# Altium PCB PCB1.PcbDoc (part 2 of 2)
Units mil, origin at the board's own origin, x right, y up, seen from the top; angles counter-clockwise.
Board outline 2755.91 x 2362.2 mil, 4 copper layers (Top Layer, GND, POWER, Bottom Layer), stack 23.756 mil thick; 125 components, 157 nets, 714 pads, 307 vias.
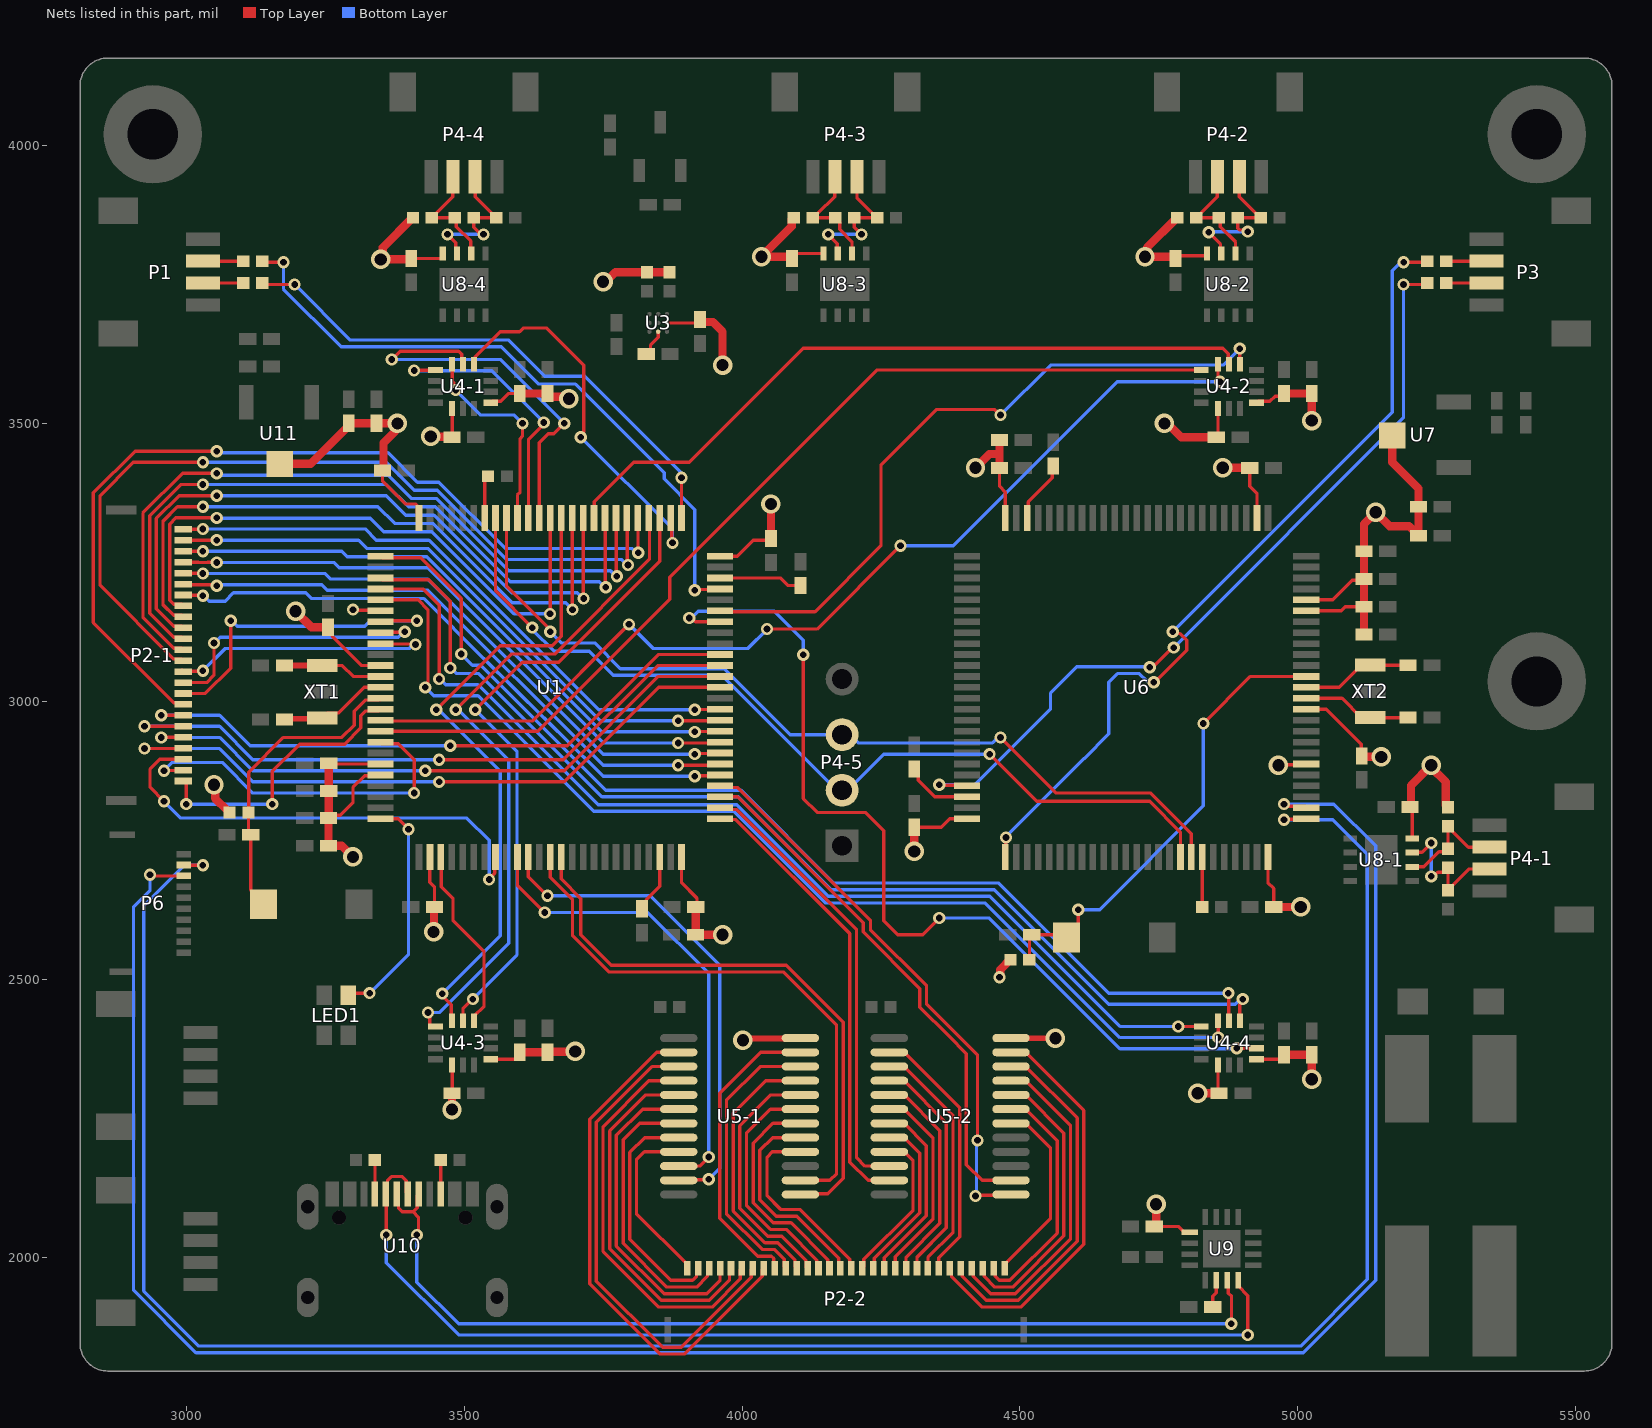
[diagram p4: the nets of this part, all layers, seen from the top]

## Via types
v1: diameter 22, hole 12, Top Layer to Bottom Layer, 205 vias
v2: diameter 35, hole 22, Top Layer to Bottom Layer, 102 vias

## Nets (pads, with @x,y where several pads share a name; then routed paths per layer and width w, separated by ;. In a path a pad name is that pad's centre, name@x,y a point inside that pad or via, vN(x,y) a via of type N, cw(c..) or ccw(c..) an arc to the next point about the centre after c; other vN are vias at no path point) (continued)
ICM4_INT2: U1.69 U4-4.9 | length 1697
  Top Layer w6: v1(3905,3150) 3909.33,3150 3916.22,3143.11 U1.69@3960.12,3143.11 ; v1(4110,3083.74) 4110,2825 4135,2800 4221.97,2800 4255,2766.97 4255,2605 4280,2580 4325,2580 v1(4355,2610) ; v1(4889.99,2375.98) 4890.12,2375.84 4925.58,2375.84 U4-4.9@4925.71,2375.71
  Bottom Layer w6: v1(3905,3150) 3909.28,3150 3921.28,3162 4058.25,3162 4110,3110.25 v1(4110,3083.74) ; v1(4355,2610) 4445,2610 4680,2375 4889.01,2375 v1(4889.99,2375.98)
MT_Lepton_EN: P6.2 U6.1 | length 4137.9
  Top Layer w6: P6.2@2995.63,2705.47 2995.86,2705.24 3029.76,2705.24 v1(3030,2705) ; v1(4975,2787) 4975.89,2787.89 5014.23,2787.89 U6.1@5015.12,2788.78
  Bottom Layer w6: v1(3030,2705) 2996.72,2705 2923.5,2631.78 2923.5,1939.02 3022.52,1840 5005,1840 5125,1960 5125,2725 5063,2787 v1(4975,2787)
MT_VSYNC: P6.3 U6.2 | length 4177.7
  Top Layer w6: v1(2935,2688.1) 2937.31,2685.79 P6.3@2995.63,2685.79 ; v1(4975,2815) 4979.33,2815 4982.86,2811.46 5012.12,2811.46 U6.2@5015.12,2808.46
  Bottom Layer w6: v1(2935,2688.1) 2935,2660.25 2905.26,2630.52 2905.26,1940.29 3017.55,1828 5009.97,1828 5140,1958.03 5140,2740 5065,2815 v1(4975,2815)
NetC4_2: C4.2 U1.48 | length 106.3
  Top Layer w6: C4.2@3820,2626.78 3827.63,2634.41 3827.63,2642.63 3851.85,2666.85 U1.48@3851.85,2719.88
NetC5_2: C5.2 U1.73 | length 150.5
  Top Layer w6: U1.73@3960.12,3221.85 4069.12,3221.85 4082.75,3208.22 C5.2@4105,3208.22
NetC20_2: C20.2 U3.C2 | length 48.7
  Top Layer w6: C20.2@3829.25,3626.78 3829.51,3626.78 3835.37,3632.63 3835.37,3641.12 3849.25,3655 U3.C2@3849.25,3664.49
  Top Layer w10: C20.2@3827.47,3625 C20.2@3829.25,3626.78
NetC36_2: C36.2 U6.48 | length 112.5
  Top Layer w6: U6.48@4513.15,3330.12 4514.8,3331.77 4514.8,3358.7 4558.29,3402.19 4558.29,3421.51 C36.2@4560,3423.22
NetC37_2: C37.2 U6.73 | length 123.4
  Top Layer w6: C37.2@4310,2878.22 4316.84,2871.38 4316.84,2858.16 4346.85,2828.15 U6.73@4404.88,2828.15
NetC56_2: C56.2 U9.6 | length 50.7
  Top Layer w6: C56.2@4846.77,1910 4846.77,1929.78 4853.07,1936.08 U9.6@4853.07,1958.07
NetP1_2: P1.2 R3.2 | length 72.5
  Top Layer w6: P1.2@3030.49,3791.83 R3.2@3102.96,3791.83
NetP1_3: P1.3 R4.2 | length 72.5
  Top Layer w6: P1.3@3030.49,3752.46 R4.2@3102.96,3752.46
NetP3_2: P3.2 R11.2 | length 72.5
  Top Layer w6: R11.2@5267.04,3752.46 P3.2@5339.51,3752.46
NetP3_3: P3.3 R12.2 | length 72.5
  Top Layer w6: R12.2@5267.04,3791.83 P3.3@5339.51,3791.83
NetR1_2: R1.2 U1.94 | length 75.3
  Top Layer w6: U1.94@3536.89,3330.12 3536.89,3403.93 R1.2@3537.96,3405
NetR9_2: R9.2 U6.94 | length 89.9
  Top Layer w6: R9.2@4827.96,2630 4828.11,2630.15 U6.94@4828.11,2719.88
NetR25_2: R25.2 U10.A5 | length 61.6
  Top Layer w6: U10.A5@3339.55,2113.36 R25.2@3339.55,2175
NetR26_2: R26.2 U10.B5 | length 61.6
  Top Layer w6: U10.B5@3457.66,2113.36 R26.2@3457.66,2175
PALM_COM_USART1_RX: P4-5.2 U1.93 U6.92 | length 1652.3
  Top Layer w6: U1.93@3556.57,3330.12 3556.57,3198.64 v1(3622.61,3132.61) ; v1(4445.38,2905) 4530.38,2820 4733.28,2820 4788.74,2764.54 U6.92@4788.74,2719.88
  Bottom Layer w6: v1(3622.61,3132.61) 3622.61,3129.11 3661.72,3090 3725,3090 3768.31,3046.69 3963.31,3046.69 4180,2830 4255,2905 v1(4445.38,2905)
PALM_COM_USART1_TX: P4-5.3 U1.92 U6.93 | length 1591.8
  Top Layer w6: U1.92@3576.26,3330.12 3576.26,3207.24 3655,3128.5 v1(3655,3125) ; v1(4465,2935) 4565,2835 4735.25,2835 4808.43,2761.83 U6.93@4808.43,2719.88
  Bottom Layer w6: v1(3655,3125) 3675,3105 3735,3105 3781.31,3058.69 3968.28,3058.69 4086.97,2940 4194.36,2940 4209.36,2925 4450.67,2925 4460.67,2935 v1(4465,2935)
PX1: P2-2.1 U5-1.9 | length 314.9
  Top Layer w6: U5-1.9@3886.1,2189.41 3824.41,2189.41 3810,2175 3810,2078.29 3901.4,1986.89 P2-2.1@3901.4,1980
PX2: P2-2.2 U5-1.8 | length 425
  Top Layer w6: U5-1.8@3886.1,2215 3824.7,2215 3798,2188.3 3798,2032 3871.8,1958.2 3911.03,1958.2 3918.18,1965.36 3918.18,1977.09 P2-2.2@3921.09,1980
PX3: P2-2.3 U5-1.7 | length 506.7
  Top Layer w6: U5-1.7@3886.1,2240.59 3815.59,2240.59 3786,2211 3786,2024.91 3864.71,1946.2 3918.72,1946.2 3937.86,1965.35 3937.86,1977.09 P2-2.3@3940.77,1980
PX4: P2-2.4 U5-1.6 | length 584.4
  Top Layer w6: U5-1.6@3886.1,2266.19 3821.19,2266.19 3774,2219 3774,2019.94 3859.74,1934.2 3936.46,1934.2 3960.46,1958.2 P2-2.4@3960.46,1980
PX5: P2-2.5 U5-1.5 | length 654.6
  Top Layer w6: U5-1.5@3886.1,2291.78 3826.78,2291.78 3762,2227 3762,2014.97 3854.77,1922.2 3941.43,1922.2 3977.43,1958.2 3977.43,1977.29 P2-2.5@3980.14,1980
PX6: P2-2.6 U5-1.4 | length 724.9
  Top Layer w6: U5-1.4@3886.1,2317.37 3832.37,2317.37 3750,2235 3750,2010 3849.8,1910.2 3946.4,1910.2 3996.92,1960.73 3996.92,1977.09 P2-2.6@3999.83,1980
PX7: P2-2.7 U5-1.3 | length 873.5
  Top Layer w6: U5-1.3@3886.1,2342.96 3837.96,2342.96 3738,2243 3738,1956.66 3856.92,1837.73 3890.9,1837.73 4016.6,1963.44 4016.6,1977.09 P2-2.7@4019.51,1980
PX8: P2-2.8 U5-1.2 | length 942.5
  Top Layer w6: U5-1.2@3886.1,2368.55 3846.58,2368.55 3726,2247.97 3726,1951.69 3851.95,1825.73 3896.67,1825.73 4036.29,1965.36 4036.29,1977.09 P2-2.8@4039.2,1980
PX9: P2-2.9 U5-1.23 | length 545.9
  Top Layer w6: P2-2.9@4058.88,1980 4057.06,1981.82 4057.06,1997.61 4052.87,2001.8 4028.2,2001.8 3960,2070 3960,2295 4033.55,2368.55 U5-1.23@4105,2368.55
PX10: P2-2.10 U5-1.22 | length 517.1
  Top Layer w6: P2-2.10@4078.57,1980 4075.66,1982.91 4075.66,1995.97 4057.84,2013.8 4036.2,2013.8 3972,2078 3972,2282 4032.96,2342.96 U5-1.22@4105,2342.96
PX11: P2-2.11 U5-1.21 | length 485
  Top Layer w6: P2-2.11@4098.25,1980 4095.34,1982.91 4095.34,1994.65 4064.2,2025.8 4041.18,2025.8 3984,2082.97 3984,2259 4042.37,2317.37 U5-1.21@4105,2317.37
PX12: P2-2.12 U5-1.20 | length 453.7
  Top Layer w6: U5-1.20@4105,2291.78 4051.78,2291.78 3996,2236 3996,2087.94 4046.15,2037.8 4071.88,2037.8 4115.03,1994.64 4115.03,1982.91 P2-2.12@4117.94,1980
PX13: P2-2.13 U5-1.19 | length 428.2
  Top Layer w6: U5-1.19@4105,2266.19 4051.19,2266.19 4008,2223 4008,2092.91 4051.12,2049.8 4079.57,2049.8 4134.71,1994.65 4134.71,1982.91 P2-2.13@4137.62,1980
PX14: P2-2.14 U5-1.18 | length 400.4
  Top Layer w6: U5-1.18@4105,2240.59 4055.59,2240.59 4020,2205 4020,2097.88 4056.09,2061.8 4088.2,2061.8 4154.4,1995.6 4154.4,1982.91 P2-2.14@4157.31,1980
PX15: P2-2.15 U5-1.17 | length 376.5
  Top Layer w6: U5-1.17@4105,2215 4055,2215 4032,2192 4032,2103 4061.2,2073.8 4098.57,2073.8 4174.08,1998.28 4174.08,1982.91 P2-2.15@4176.99,1980
PX16: P2-2.16 U5-1.16 | length 347.2
  Top Layer w6: U5-1.16@4105,2189.41 4054.41,2189.41 4045,2180 4045,2110 4069.2,2085.8 4104.2,2085.8 4193.77,1996.23 4193.77,1982.91 P2-2.16@4196.68,1980
PX17: P2-2.17 U5-2.9 | length 280.4
  Top Layer w6: P2-2.17@4216.36,1980 4219.26,1982.91 4219.26,1996.23 4307.66,2084.63 4307.66,2173.24 4291.5,2189.41 U5-2.9@4265,2189.41
PX18: P2-2.18 U5-2.8 | length 307.8
  Top Layer w6: P2-2.18@4236.05,1980 4237.74,1981.69 4237.74,1997.74 4319.66,2079.66 4319.66,2186.83 4291.5,2215 U5-2.8@4265,2215
PX19: P2-2.19 U5-2.7 | length 335.2
  Top Layer w6: P2-2.19@4255.73,1980 4255.73,1998.76 4331.66,2074.69 4331.66,2200.42 4291.5,2240.59 U5-2.7@4265,2240.59
PX20: P2-2.20 U5-2.6 | length 362.6
  Top Layer w6: U5-2.6@4265,2266.19 4291.5,2266.19 4343.66,2214.02 4343.66,2068.66 4275.42,2000.42 P2-2.20@4275.42,1980
PX21: P2-2.21 U5-2.5 | length 389.9
  Top Layer w6: U5-2.5@4265,2291.78 4291.5,2291.78 4355.66,2227.61 4355.66,2060.66 4295.1,2000.1 P2-2.21@4295.1,1980
PX22: P2-2.22 U5-2.4 | length 417.3
  Top Layer w6: U5-2.4@4265,2317.37 4291.5,2317.37 4367.66,2241.2 4367.66,2052.66 4314.79,1999.79 P2-2.22@4314.79,1980
PX23: P2-2.23 U5-2.3 | length 444.7
  Top Layer w6: U5-2.3@4265,2342.96 4291.5,2342.96 4379.66,2254.79 4379.66,2044.66 4334.47,1999.47 P2-2.23@4334.47,1980
PX24: P2-2.24 U5-2.2 | length 472.1
  Top Layer w6: U5-2.2@4265,2368.55 4291.5,2368.55 4391.66,2268.38 4391.66,2036.66 4354.16,1999.16 P2-2.24@4354.16,1980
PX25: P2-2.25 U5-2.23 | length 738.8
  Top Layer w6: P2-2.25@4373.84,1980 4376.74,1977.09 4376.74,1965.36 4431.89,1910.2 4501.78,1910.2 4615,2023.42 4615,2263.95 4510.4,2368.55 U5-2.23@4483.9,2368.55
PX26: P2-2.26 U5-2.22 | length 663.7
  Top Layer w6: P2-2.26@4393.53,1980 4396.43,1977.09 4396.43,1965.35 4439.57,1922.2 4496.81,1922.2 4603,2028.39 4603,2250.36 4510.4,2342.96 U5-2.22@4483.9,2342.96
PX27: P2-2.27 U5-2.21 | length 588.6
  Top Layer w6: P2-2.27@4413.21,1980 4416.11,1977.09 4416.11,1965.36 4447.26,1934.2 4491.84,1934.2 4591,2033.36 4591,2236.77 4510.4,2317.37 U5-2.21@4483.9,2317.37
PX28: P2-2.28 U5-2.20 | length 513.5
  Top Layer w6: P2-2.28@4432.9,1980 4435.8,1977.09 4435.8,1965.35 4454.94,1946.2 4486.87,1946.2 4579,2038.33 4579,2223.18 4510.4,2291.78 U5-2.20@4483.9,2291.78
PX29: P2-2.29 U5-2.19 | length 438.4
  Top Layer w6: P2-2.29@4452.58,1980 4455.48,1977.09 4455.48,1965.36 4462.63,1958.2 4481.9,1958.2 4567,2043.3 4567,2209.59 4510.4,2266.19 U5-2.19@4483.9,2266.19
PX30: P2-2.30 U5-2.18 | length 339.8
  Top Layer w6: P2-2.30@4472.27,1980 4472.27,1986.89 4555,2069.62 4555,2195.99 4510.4,2240.59 U5-2.18@4483.9,2240.59
PY1: P2-1.1 U1.15 | length 512.9
  Top Layer w6: P2-1.1@2995,2856.58 2997.09,2856.58 3000,2853.67 v1(3000,2815) ; v1(3155,2815) 3155,2874.01 3203.99,2923 3284.97,2923 3314.17,2952.2 3314.17,2974.17 3322.64,2982.64 3346.89,2982.64 U1.15@3349.88,2985.63
  Bottom Layer w6: v1(3000,2815) v1(3155,2815)
PY2: P2-1.2 U1.18 | length 647.7
  Top Layer w6: v1(2960,2875) 2960.63,2875.63 2994.37,2875.63 P2-1.2@2995,2876.26 ; U1.18@3349.88,2926.57 3352.88,2923.57 3381.43,2923.57 3410,2895 v1(3410,2835)
  Bottom Layer w6: v1(2960,2875) 2975,2890 3065,2890 3120,2835 v1(3410,2835)
PY3: P2-1.3 U1.33 | length 865.6
  Top Layer w6: v1(2960,2820) 2935,2845 2935,2878.28 2952.67,2895.95 P2-1.3@2995,2895.95 ; v1(3545,2679.51) 3545,2680.86 3555.18,2691.05 3555.18,2718.49 U1.33@3556.57,2719.88
  Bottom Layer w6: v1(2960,2820) 2990,2790 3505,2790 3545,2750 v1(3545,2679.51)
PY4: P2-1.4 U1.63 | length 1200.6
  Top Layer w6: v1(2925,2915) 2994.37,2915 P2-1.4@2995,2915.63 ; v1(3455,2855) 3679.81,2855 3849.81,3025 U1.63@3960.12,3025
  Bottom Layer w6: v1(2925,2915) 3060,2915 3120,2855 v1(3455,2855)
PY5: P2-1.5 U1.64 | length 1140.4
  Top Layer w6: v1(2955,2935) 2955.16,2935.16 2994.84,2935.16 P2-1.5@2995,2935.32 ; v1(3430,2875) 3679.97,2875 3849.65,3044.68 U1.64@3960.12,3044.68
  Bottom Layer w6: v1(2955,2935) 3060,2935 3120,2875 v1(3430,2875)
PY6: P2-1.6 U1.65 | length 1200.1
  Top Layer w6: v1(2925,2955) P2-1.6@2995,2955 ; v1(3455,2895) 3678.74,2895 3848.11,3064.37 U1.65@3960.12,3064.37
  Bottom Layer w6: v1(2925,2955) 3060,2955 3120,2895 v1(3455,2895)
PY7: P2-1.7 U1.66 | length 1136
  Top Layer w6: v1(2955,2975) 2955.16,2974.84 2994.84,2974.84 P2-1.7@2995,2974.68 ; v1(3475,2920) 3685.41,2920 3849.46,3084.06 U1.66@3960.12,3084.06
  Bottom Layer w6: v1(2955,2975) 3060,2975 3115,2920 v1(3475,2920)
PY8: P2-1.8 U1.80 | length 1606.9
  Top Layer w6: P2-1.8@2995,2994.37 2992.09,2997.28 2977.39,2997.28 2833,3141.67 2833,3374.97 2908.03,3450 v1(3055,3450) ; U1.80@3812.48,3330.12 3812.95,3329.65 3812.95,3267.61 v1(3813.43,3267.14)
  Bottom Layer w6: v1(3055,3450) 3058.06,3446.94 3363.06,3446.94 3416,3394 3454.79,3394 3573.79,3275 3801.91,3275 3809.77,3267.14 v1(3813.43,3267.14)
PY9: P2-1.9 U1.7 | length 598.4
  Top Layer w6: P2-1.9@2995,3014.05 3034.3,3014.05 3080,3059.75 v1(3080,3145) ; U1.7@3349.88,3143.11 3351.77,3145 v1(3415,3145)
  Bottom Layer w6: v1(3080,3145) 3081.51,3145 3091.51,3135 3321.25,3135 3331.25,3145 v1(3415,3145)
PY10: P2-1.10 U1.8 | length 514.1
  Top Layer w6: P2-1.10@2995,3033.74 3037.02,3033.74 3050,3046.72 v1(3050,3105) ; U1.8@3349.88,3123.43 3350.67,3124.21 3392.41,3124.21 v1(3393.2,3125)
  Bottom Layer w6: v1(3050,3105) 3051.51,3105 3061.51,3115 3381.69,3115 3391.69,3125 v1(3393.2,3125)
PY11: P2-1.11 U1.9 | length 505.4
  Top Layer w6: P2-1.11@2992.09,3056.33 P2-1.11@2995,3053.42 2995.79,3054.21 3029.21,3054.21 v1(3030,3055) ; U1.9@3349.88,3103.74 3350.62,3103 3411.91,3103 v1(3412.65,3102.26)
  Bottom Layer w6: v1(3030,3055) 3070,3095 3401.13,3095 3408.39,3102.26 v1(3412.65,3102.26)
PY12: P2-1.12 U1.81 | length 1504.8
  Top Layer w6: P2-1.12@2995,3073.11 2992.09,3076.02 2977.4,3076.02 2845,3208.42 2845,3370 2905,3430 v1(3030,3430) ; U1.81@3792.8,3330.12 3793.43,3329.49 3793.43,3246.57 v1(3794.87,3245.13)
  Bottom Layer w6: v1(3030,3430) 3360,3430 3410,3380 3451.82,3380 3576.82,3255 3783.36,3255 3793.23,3245.13 v1(3794.87,3245.13)
PY13: P2-1.13 U1.82 | length 1349.2
  Top Layer w6: P2-1.13@2995,3092.8 2992.09,3095.71 2977.39,3095.71 2922.25,3150.85 2922.25,3338.85 2993.41,3410 v1(3055,3410) ; U1.82@3773.11,3330.12 3773.99,3329.24 3773.99,3226.01 v1(3774.87,3225.13)
  Bottom Layer w6: v1(3055,3410) 3058.06,3406.94 3363.06,3406.94 3405,3365 3449.85,3365 3579.85,3235 3763.36,3235 3773.23,3225.13 v1(3774.87,3225.13)
PY14: P2-1.14 U1.83 | length 1301.2
  Top Layer w6: P2-1.14@2995,3112.48 2992.09,3115.39 2977.4,3115.39 2934.25,3158.54 2934.25,3333.87 2990.38,3390 v1(3030,3390) ; U1.83@3753.43,3330.12 3754.15,3329.39 3754.15,3205.85 v1(3754.87,3205.13)
  Bottom Layer w6: v1(3030,3390) 3360,3390 3400,3350 3447.88,3350 3582.88,3215 3743.36,3215 3753.23,3205.13 v1(3754.87,3205.13)
PY15: P2-1.15 U1.85 | length 1233.4
  Top Layer w6: P2-1.15@2995,3132.17 2992.09,3135.08 2977.39,3135.08 2946.25,3166.22 2946.25,3328.9 2987.35,3370 v1(3055,3370) ; U1.85@3714.06,3330.12 3714.53,3329.65 3714.53,3185.47 v1(3715,3185)
  Bottom Layer w6: v1(3055,3370) 3360,3370 3395,3335 3445.91,3335 3585.91,3195 3703.49,3195 3713.49,3185 v1(3715,3185)
PY16: P2-1.16 U1.86 | length 1185.4
  Top Layer w6: P2-1.16@2995,3151.85 2992.09,3154.76 2977.4,3154.76 2958.25,3173.91 2958.25,3323.93 2984.32,3350 v1(3030,3350) ; U1.86@3694.37,3330.12 3694.69,3329.8 3694.69,3165.31 v1(3695,3165)
  Bottom Layer w6: v1(3030,3350) 3345,3350 3375,3320 3443.94,3320 3586.69,3177.25 3682.75,3177.25 v1@3694.93,3165.07
PY17: P2-1.17 U1.88 | length 1099.7
  Top Layer w6: P2-1.17@2995,3171.54 2992.09,3174.45 2977.39,3174.45 2970.25,3181.59 2970.25,3318.96 2981.29,3330 v1(3055,3330) ; v1(3654.53,3157.25) 3654.76,3157.49 3654.76,3329.88 U1.88@3655,3330.12
  Bottom Layer w6: v1(3055,3330) 3055.64,3329.36 3330.87,3329.36 3355.23,3305 3441.97,3305 3589.72,3157.25 v1(3654.53,3157.25)
PY18: P2-1.18 U1.55 | length 1112.8
  Top Layer w6: P2-1.18@2995,3191.22 2995.7,3190.52 3029.3,3190.52 v1(3030,3189.82) ; v1(3915,2865) 3916.26,2866.26 3958.86,2866.26 U1.55@3960.12,2867.52
  Bottom Layer w6: v1(3030,3189.82) 3031.69,3189.82 3041.51,3180 3070,3180 3085,3195 3215,3195 3225,3185 3426.97,3185 3534.97,3077 3750,2865 3752.49,2865 v1(3915,2865)
PY19: P2-1.19 U1.56 | length 1102.5
  Top Layer w6: P2-1.19@2995,3210.91 2996.09,3209.82 3053.2,3209.82 v1(3055,3208.02) ; v1(3885,2885) 3957.91,2885 U1.56@3960.12,2887.2
  Bottom Layer w6: v1(3055,3208.02) 3056.8,3209.82 3243.78,3209.82 3253.61,3200 3435,3200 3750,2885 v1(3885,2885)
PY20: P2-1.20 U1.57 | length 1100.8
  Top Layer w6: P2-1.20@2995,3230.59 2995.38,3230.21 3029.62,3230.21 v1(3030,3229.82) ; v1(3915,2905) 3915.94,2905.94 3959.17,2905.94 U1.57@3960.12,2906.89
  Bottom Layer w6: v1(3030,3229.82) 3250.18,3229.82 3260,3220 3435,3220 3750,2905 v1(3915,2905)
PY21: P2-1.21 U1.58 | length 1100.7
  Top Layer w6: P2-1.21@2995,3250.28 2995.28,3250 3021.54,3250 3021.72,3249.82 3038.28,3249.82 3038.46,3250 3054.82,3250 v1(3055,3249.82) ; v1(3885,2925) 3958.54,2925 U1.58@3960.12,2926.57
  Bottom Layer w6: v1(3055,3249.82) 3265.18,3249.82 3275,3240 3435,3240 3750,2925 v1(3885,2925)
PY22: P2-1.22 U1.59 | length 1100.2
  Top Layer w6: P2-1.22@2995,3269.96 2995.07,3269.89 3029.93,3269.89 v1(3030,3269.82) ; v1(3915,2945) 3915.63,2945.63 3959.49,2945.63 U1.59@3960.12,2946.26
  Bottom Layer w6: v1(3030,3269.82) 3279.82,3269.82 3289.65,3260 3432.99,3260 3747.99,2945 v1(3915,2945)
PY23: P2-1.23 U1.60 | length 1100.3
  Top Layer w6: P2-1.23@2995,3289.65 2995.18,3289.82 3054.82,3289.82 v1(3055,3290) ; v1(3885,2965) 3959.17,2965 U1.60@3960.12,2965.94
  Bottom Layer w6: v1(3055,3290) 3310,3290 3325,3275 3434.96,3275 3744.96,2965 v1(3885,2965)
PY24: P2-1.24 U1.61 | length 1100.3
  Top Layer w6: P2-1.24@2995,3309.33 2995.34,3309.66 3029.66,3309.66 v1(3030,3310) ; v1(3915,2985) 3915.31,2985.31 3959.8,2985.31 U1.61@3960.12,2985.63
  Bottom Layer w6: v1(3030,3310) 3322.05,3310 3342.05,3290 3436.93,3290 3602.61,3124.32 3741.93,2985 v1(3915,2985)
RS485_A_FINGER1: P4-1.3 R14.1 R15.1 U8-1.6 | length 207.3
  Top Layer w6: U8-1.6@5205.61,2702.2 5226.91,2702.2 5253.88,2729.17 5264.27,2729.17 R15.1@5270,2734.9 5270,2774.49 5306.95,2737.54 P4-1.3@5344.51,2737.54
RS485_A_FINGER2: P4-2.3 R17.1 R18.1 U8-2.6 | length 202
  Top Layer w6: R17.1@4817.04,3870 R18.1@4857.96,3870 4860.35,3867.61 4860.35,3853.88 4887.8,3826.43 U8-2.6@4887.8,3810.61 ; R17.1@4817.55,3870 4855.27,3907.72 P4-2.3@4855.31,3943.72 P4-2.3@4855.31,3943.72
RS485_A_FINGER3: P4-3.3 R20.1 R21.1 U8-3.6 | length 209.9
  Top Layer w6: R21.1@4167.36,3870.6 R21.1@4167.96,3870 R20.1@4127.04,3870 4134.67,3877.63 4136.62,3877.63 4166.71,3907.72 4166.71,3943.07 P4-3.3@4167.36,3943.72 ; R21.1@4168.47,3870 4176.1,3862.37 4176.1,3848.91 4197.8,3827.2 U8-3.6@4197.8,3805.61
RS485_A_FINGER4: P4-4.3 R23.1 R24.1 U8-4.6 | length 209.1
  Top Layer w6: R24.1@3480.32,3870 R23.1@3442.04,3870 3442.55,3870 3450.18,3877.63 3450.18,3878.14 3479.76,3907.72 3479.76,3943.17 P4-4.3@3480.32,3943.72 ; R24.1@3480.32,3872.64 R24.1@3482.96,3870 ; R24.1@3483.47,3870 R24.1@3482.96,3870 ; U8-4.6@3512.8,3805.61 3511.82,3806.59 3511.82,3828.18 3486.12,3853.88 3486.12,3866.84 R24.1@3482.96,3870
RS485_B_FINGER1: P4-1.2 R13.2 R15.2 U8-1.7 | length 269.3
  Top Layer w6: U8-1.7@5205.61,2727.8 5206.21,2728.4 5223.4,2728.4 v1(5240,2745) ; v1(5240,2685) 5244.33,2685 5252.01,2692.68 5262.37,2692.68 5270,2700.31 R15.2@5270,2700.82 R13.2@5270,2660 ; R13.2@5270,2660.51 5307.67,2698.17 P4-1.2@5344.51,2698.17
  Bottom Layer w6: v1(5240,2685) v1(5240,2745)
RS485_B_FINGER2: P4-2.2 R16.2 R18.2 U8-2.7 | length 284
  Top Layer w6: v1(4839.53,3844.01) 4860.8,3822.75 4860.8,3812.01 U8-2.7@4862.2,3810.61 ; P4-2.2@4894.69,3943.72 P4-2.2@4894.69,3943.72 4894.73,3907.72 4932.45,3870 R16.2@4932.96,3870 R18.2@4892.04,3870 4892.04,3850.91 4894.88,3848.06 4906.94,3848.06 v1(4910,3845)
  Bottom Layer w6: v1(4839.53,3844.01) 4840.52,3845 v1(4910,3845)
RS485_B_FINGER3: P4-3.2 R19.2 R21.2 U8-3.7 | length 273.5
  Top Layer w6: v1(4155,3840) 4171.6,3823.4 4171.6,3806.21 U8-3.7@4172.2,3805.61 ; R21.2@4206.73,3874.69 R21.2@4202.04,3870 ; P4-3.2@4206.73,3943.72 4206.73,3905.72 4242.45,3870 R19.2@4242.96,3870 R21.2@4202.04,3870 ; v1(4215,3840) 4202.04,3852.96 R21.2@4202.04,3870
  Bottom Layer w6: v1(4155,3840) v1(4215,3840)
RS485_B_FINGER4: P4-4.2 R22.2 R24.2 U8-4.7 | length 278.8
  Top Layer w6: v1(3470,3840) 3484.69,3825.31 3484.69,3808.12 U8-4.7@3487.2,3805.61 ; R24.2@3519.68,3870 R22.2@3557.96,3870 3557.45,3870 3549.82,3877.63 3549.82,3878.14 3520.24,3907.72 3520.24,3943.17 P4-4.2@3519.68,3943.72 ; R24.2@3519.68,3872.64 R24.2@3517.04,3870 3517.04,3852.89 3526.87,3843.06 3531.94,3843.06 v1(3535,3840)
  Bottom Layer w6: v1(3470,3840) v1(3535,3840)
S1-0: U1.35 U5-1.10 | length 851.8
  Top Layer w6: U1.35@3595.94,2719.88 3595.94,2669.06 v1(3645,2620) ; U5-1.10@3886.1,2163.82 3923.82,2163.82 v1(3940,2180)
  Bottom Layer w6: v1(3645,2620) 3830.67,2620 3940,2510.67 v1(3940,2180)
S1-1: U1.36 U5-1.11 | length 893.8
  Top Layer w6: U1.36@3615.63,2719.88 3615.63,2684.37 v1(3650,2650) ; U5-1.11@3886.1,2138.23 3886.99,2139.11 3939.11,2139.11 v1(3940,2140)
  Bottom Layer w6: v1(3650,2650) 3835,2650 3960,2525 3960,2160 v1(3940,2140)
S1-2: U1.38 U5-1.14 | length 1037.3
  Top Layer w6: U1.38@3655,2719.88 3655,2683.03 3695,2643.03 3695,2578.03 3760.03,2513 4074.48,2513 4170,2417.48 4170,2150 4158.23,2138.23 U5-1.14@4105,2138.23
S1-3: U1.39 U5-1.13 | length 1061.4
  Top Layer w6: U1.39@3674.68,2719.88 3674.68,2680.32 3710,2645 3710,2580 3765,2525 4079.45,2525 4167,2437.45 4182,2422.45 4182,2142 4154.01,2114.01 4106.37,2114.01 U5-1.13@4105,2112.64
S2-0: U1.52 U5-2.10 | length 812.1
  Top Layer w6: U1.52@3960.12,2808.46 3963.12,2805.46 3989.54,2805.46 4206,2589 4206,2179 4221.18,2163.82 U5-2.10@4265,2163.82
S2-1: U1.51 U5-2.11 | length 815.3
  Top Layer w6: U1.51@3960.12,2788.78 3961.56,2787.34 3988.91,2787.34 4194,2582.25 4194,2171 4226.77,2138.23 U5-2.11@4265,2138.23
S2-2: U1.53 U5-2.14 | length 956
  Top Layer w6: U1.53@3960.12,2828.15 3991.85,2828.15 4218,2602 4218,2585.03 4320,2483.03 4320,2449.75 4371.75,2398 4403.66,2366.08 4403.66,2166.34 4431.77,2138.23 U5-2.14@4483.9,2138.23
S2-3: U1.54 U5-2.13 | length 1013.3
  Top Layer w6: U1.54@3960.12,2847.83 3963.12,2844.83 3992.14,2844.83 4231,2605.97 4231,2589 4332,2488 4332,2454.72 4423.66,2363.05 v1(4423.66,2210) ; v1(4420,2110) 4421.32,2111.32 4482.58,2111.32 U5-2.13@4483.9,2112.64
  Bottom Layer w6: v1(4420,2110) 4421.83,2111.83 4421.83,2208.17 v1(4423.66,2210)
SPI1_MISO: U1.90 U4-1.1 | length 493.9
  Top Layer w6: v1(3410,3595) 3410.59,3595.59 3447.79,3595.59 U4-1.1@3448.39,3596.18 ; U1.90@3615.63,3330.12 3615.79,3330.28 3615.79,3470.79 3643.36,3498.36 v1(3643.36,3501.64)
  Bottom Layer w6: v1(3410,3595) 3550,3595 v1(3643.36,3501.64)
SPI1_MOSI: U1.91 U4-1.14 | length 367.7
  Top Layer w6: U4-1.14@3478.39,3606.51 3478.39,3575.94 3481.94,3572.39 3481.94,3563.06 v1(3485,3560) ; U1.91@3595.94,3330.12 3595.94,3371.19 3600.63,3375.88 3600.63,3472.6 3605,3476.97 v1(3605,3500)
  Bottom Layer w6: v1(3485,3560) 3530,3515 3590,3515 v1(3605,3500)
SPI1_NSS: U1.77 U4-1.12 | length 695.3
  Top Layer w6: U4-1.12@3517.76,3606.51 3520.27,3609.03 3520.27,3620.27 3565,3665 3599.74,3665 3606.24,3671.5 3648.5,3671.5 3715.07,3604.93 3715.07,3484.4 3710,3479.33 v1(3710,3475) ; U1.77@3871.54,3330.12 3873.27,3328.39 3873.27,3286.73 v1(3875,3285)
  Bottom Layer w6: v1(3710,3475) 3875,3310 v1(3875,3285)
SPI1_SCK: U1.89 U4-1.13 | length 704.9
  Top Layer w6: v1(3370,3615) 3385,3630 3490,3630 3495.55,3624.45 3495.55,3609.03 U4-1.13@3498.07,3606.51 ; U1.89@3635.32,3330.12 3635.32,3465.32 3651.13,3481.13 3661.13,3481.13 v1(3680,3500)
  Bottom Layer w6: v1(3370,3615) 3565,3615 v1(3680,3500)
SPI2_MISO: U1.17 U4-2.1 | length 1768.9
  Top Layer w6: U1.17@3349.88,2946.26 3632.83,2946.26 3870,3183.43 3870,3223.03 4243.15,3596.18 U4-2.1@4826.34,3596.18
SPI2_MOSI: U1.16 U4-2.14 | length 1832.6
  Top Layer w6: U1.16@3349.88,2965.94 3351.41,2964.42 3622.7,2964.42 v1(3796.64,3138.36) ; v1(4045,3130) 4135,3130 v1(4285,3280) ; U4-2.14@4856.34,3606.51 4856.34,3582.99 4860,3579.33 v1(4860,3575)
  Bottom Layer w6: v1(3796.64,3138.36) 3840,3095 4010,3095 v1(4045,3130) ; v1(4285,3280) 4380,3280 4675,3575 v1(4860,3575)
SPI2_NSS: U1.70 U4-2.12 | length 1253.4
  Top Layer w6: U1.70@3960.12,3162.8 3961.52,3161.4 4131.4,3161.4 4250,3280 4250,3425 4350,3525 4453.49,3525 4463.49,3515 v1(4465,3515) ; v1(4895.58,3634.56) 4895.65,3634.5 4895.65,3606.58 U4-2.12@4895.71,3606.51
  Bottom Layer w6: v1(4465,3515) 4555,3605 4866.02,3605 v1(4895.58,3634.56)
SPI2_SCK: U1.84 U4-2.13 | length 1307.4
  Top Layer w6: U1.84@3733.74,3330.12 3734.1,3330.48 3734.1,3359.1 3805,3430 3905,3430 4110,3635 4865,3635 4874.99,3625.01 4874.99,3607.54 U4-2.13@4876.02,3606.51
SPI3_MISO: U1.79 U4-3.1 | length 1229.4
  Top Layer w6: v1(3435,2440) 3435,2435.67 3438.1,2432.57 3438.1,2417.59 3440.61,2415.08 U4-3.1@3448.39,2415.08 ; v1(3485,2985) 3585,3085 3663.03,3085 3833.43,3255.4 3833.43,3328.86 U1.79@3832.17,3330.12
  Bottom Layer w6: v1(3435,2440) 3455,2440 3580,2565 3580,2894.33 3489.33,2985 v1(3485,2985)
SPI3_MOSI: U1.87 U4-3.14 | length 1153.2
  Top Layer w6: v1(3450,2985) 3565,3100 3658.28,3100 3675,3116.72 3675,3133.28 3674.68,3133.6 U1.87@3674.68,3330.12 ; v1(3460.86,2474.14) 3460.86,2469.81 3476.69,2453.98 3476.69,2427.1 U4-3.14@3478.39,2425.41
  Bottom Layer w6: v1(3450,2985) 3454.33,2985 3565,2874.33 3565,2578.28 v1(3460.86,2474.14)
SPI3_NSS: U1.28 U4-3.12 | length 334.1
  Top Layer w6: U1.28@3458.15,2719.88 3458.78,2719.26 3458.78,2666.23 3480,2645 3480,2605 3535.78,2549.22 3535.78,2451.22 3517.76,2433.19 U4-3.12@3517.76,2425.41
SPI3_SCK: U1.78 U4-3.13 | length 1152.4
  Top Layer w6: U4-3.13@3498.07,2425.41 3498.07,2448.07 3514.22,2464.22 v1(3515.78,2464.22) ; v1(3520,2985) 3605,3070 3670,3070 3851.85,3251.85 U1.78@3851.85,3330.12
  Bottom Layer w6: v1(3515.78,2464.22) 3595,2543.43 3595,2910 v1(3520,2985)
SPI4_MISO: U1.4 U4-4.1 | length 1880.5
  Top Layer w6: U1.4@3349.88,3202.17 3425.83,3202.17 3455,3173 v1(3455,3040) ; v1(4785,2415) v1(4785,2415) 4826.3,2415.04 U4-4.1@4826.34,2415.08
  Bottom Layer w6: v1(3455,3040) 3456.51,3040 3466.51,3030 3525,3030 3741,2814 3990.28,2814 4155.28,2649 4446,2649 4680,2415 v1(4785,2415)
SPI4_MOSI: U1.5 U4-4.14 | length 1952.5
  Top Layer w6: U1.5@3349.88,3182.48 3417.52,3182.48 3435,3165 3435,3034.33 3430,3029.33 v1(3430,3025) ; U4-4.14@4856.34,2425.41 4856.48,2425.27 4856.48,2395.14 v1(4856.63,2395)
  Bottom Layer w6: v1(3430,3025) 3445,3010 3525,3010 3733,2802 3985.31,2802 4150.31,2637 4438,2637 4680,2395 v1(4856.63,2395)
SPI4_NSS: U1.3 U4-4.12 | length 1983.6
  Top Layer w6: U1.3@3349.88,3221.85 3352.88,3218.85 3436.15,3218.85 3475,3180 v1(3475,3060) ; U4-4.12@4895.71,2425.41 4895.71,2454.73 4900.82,2459.85 v1(4900.82,2464.18)
  Bottom Layer w6: v1(3475,3060) 3476.51,3060 3486.51,3050 3526.06,3050 3748.06,2828 3993.25,2828 4160.25,2661 4454,2661 4660,2455 4887.32,2455 4896.49,2464.18 v1(4900.82,2464.18)
SPI4_SCK: U1.1 U4-4.13 | length 1959.4
  Top Layer w6: U1.1@3349.88,3261.22 3352.88,3258.22 3421.78,3258.22 3495,3185 v1(3495,3085) ; v1(4875,2475) 4875.51,2474.49 4875.51,2425.92 U4-4.13@4876.02,2425.41
  Bottom Layer w6: v1(3495,3085) 3515,3065 3530,3065 3755,2840 3998.22,2840 4165.22,2673 4462,2673 4660,2475 v1(4875,2475)
SWCLK_COM: R12.1 U6.76 | length 1501.8
  Top Layer w6: U6.76@4473.78,2719.88 4474.39,2720.49 4474.39,2754.39 v1(4475,2755) ; v1(4740.86,3034.14) 4742.43,3034.14 4800,3091.72 4800,3110 4788.06,3121.94 4778.06,3121.94 v1(4775,3125) ; v1(5190.29,3789.79) 5230.92,3789.79 R12.1@5232.96,3791.83
  Bottom Layer w6: v1(4475,2755) 4475,2756.97 4615.03,2897 4615.28,2897 4660,2941.72 4660,3034.61 4675.39,3050 4715,3050 4727.8,3037.2 4737.8,3037.2 v1(4740.86,3034.14) ; v1(4775,3125) 5170,3520 5170,3775 5184.79,3789.79 v1(5190.29,3789.79)
SWCLK_PALM: R4.1 U1.76 | length 976.4
  Top Layer w6: R4.1@3137.04,3752.46 3139.5,3750 v1(3195,3750) ; v1(3891.08,3402.2) 3891.15,3402.13 3891.15,3330.19 U1.76@3891.22,3330.12
  Bottom Layer w6: v1(3195,3750) 3295,3650 3580,3650 3645,3585 3716.97,3585 3891.08,3410.89 v1(3891.08,3402.2)
SWDIO_COM: R11.1 U6.72 | length 1460.6
  Top Layer w6: v1(4355,2850) 4356.08,2848.92 4403.8,2848.92 U6.72@4404.88,2847.83 ; v1(4733.57,3061.18) 4737.9,3061.18 4743.65,3066.93 4744.1,3066.93 4773.82,3096.64 v1(4776.64,3096.64) ; v1(5190,3750) 5230.5,3750 R11.1@5232.96,3752.46
  Bottom Layer w6: v1(4355,2850) 4418.67,2850 4555,2986.33 4555,3015 4602,3062 4732.75,3062 v1(4733.57,3061.18) ; v1(4776.64,3096.64) 5190,3510 v1(5190,3750)
SWDIO_PALM: R3.1 U1.72 | length 1188.9
  Top Layer w6: R3.1@3137.04,3791.83 3138.87,3790 v1(3175,3790) ; v1(3915,3200) 3916.08,3201.08 3959.04,3201.08 U1.72@3960.12,3202.17
  Bottom Layer w6: v1(3175,3790) 3175,3741.72 3278.72,3638 3567,3638 3634.21,3570.79 3700.46,3570.79 3860,3411.25 3860,3400 3915,3345 v1(3915,3200)
TIM2_CH4: LED1.3 U1.25 | length 421.9
  Top Layer w6: LED1.3@3291.66,2471.03 3295.63,2475 v1(3330,2475) ; U1.25@3349.88,2788.78 3381.22,2788.78 v1(3400,2770)
  Bottom Layer w6: v1(3330,2475) 3400,2545 v1(3400,2770)
U1_NRST: C3.1 R2.1 S1.1 U1.14 | length 555.7
  Top Layer w6: R2.1@3112.04,2800 3112.04,2764.11 C3.1@3116.14,2760 3116.14,2660.39 3138.98,2637.56 S1.1@3138.98,2635 ; R2.1@3112.55,2800 3112.55,2872.55 3175,2935 3280,2935 3302.17,2957.17 3302.17,2982.17 3322.32,3002.32 3346.88,3002.32 U1.14@3349.88,3005.32
U1_OSC1_IN: C2.2 U1.12 XT1.1 | length 181.3
  Top Layer w6: XT1.1@3245,3064.4 3280.6,3064.4 3300.31,3044.69 U1.12@3349.88,3044.69
  Top Layer w10: C2.2@3176.78,3064.4 XT1.1@3245,3064.4
U1_OSC1_OUT: C1.2 U1.13 XT1.3 | length 197
  Top Layer w6: XT1.3@3245,2970 3253.81,2978.81 3273.81,2978.81 3320,3025 U1.13@3349.88,3025
  Top Layer w10: C1.2@3176.78,2967.2 3178.18,2968.6 3243.6,2968.6 XT1.3@3245,2970
U6_NRST: C35.1 R10.1 S2.1 U6.14 | length 841.1
  Top Layer w6: R10.1@4517.04,2535 4517.04,2575.89 C35.1@4521.15,2580 4578.98,2580 S2.1@4583.98,2575 4605,2596.02 v1(4605,2625) ; v1(4830,2960) 4914.69,3044.68 U6.14@5015.12,3044.68
  Bottom Layer w6: v1(4605,2625) 4643.28,2625 4830,2811.72 v1(4830,2960)
U6_OSC1_IN: C34.2 U6.12 XT2.1 | length 197.5
  Top Layer w6: U6.12@5015.12,3005.31 5079.54,3005.31 5114.25,2970.6 XT2.1@5130,2970.6 C34.2@5198.23,2970.6
U6_OSC1_OUT: C33.2 U6.13 XT2.3 | length 199.7
  Top Layer w6: U6.13@5015.12,3025 5074.25,3025 5114.25,3065 XT2.3@5130,3065 C33.2@5198.23,3065
USB_D+: U9.7 U10.A6 U10.B6 | length 1800.4
  Top Layer w6: U10.A6@3378.92,2113.36 3381.83,2110.46 3381.83,2088.87 3388.98,2081.72 3408.24,2081.72 ; v1(3415,2040) 3417.84,2042.84 3417.84,2072.13 3408.24,2081.72 ; U10.B6@3418.29,2113.36 3415.39,2110.46 3415.39,2088.87 3408.24,2081.72 ; U9.7@4872.76,1958.07 4874.68,1956.15 4874.68,1935.32 4880.64,1929.36 4880.64,1880.64 v1(4880,1880)
  Bottom Layer w6: v1(3415,2040) 3415,1955 3490,1880 v1(4880,1880)
USB_D-: U9.8 U10.A7 U10.B7 | length 1923.7
  Top Layer w6: v1(3360,2040) 3359.62,2040.38 3359.62,2112.98 U10.B7@3359.24,2113.36 3362.14,2116.27 3362.14,2137.85 3369.29,2145 3388.56,2145 3395.7,2137.85 3395.7,2116.27 U10.A7@3398.61,2113.36 ; U9.8@4892.44,1958.07 4892.44,1948.23 4910,1930.67 v1(4910,1860)
  Bottom Layer w6: v1(3360,2040) 3360,1990 3490,1860 v1(4910,1860)
VDD1: C6.1 C7.1 C8.1 C9.2 C10.2 C11.2 C12.2 C13.2 C18.2 C21.2 C22.1 C23.1 C24.2 C25.1 C26.1 C27.2 C28.1 C29.1 C30.2 C31.1 C32.1 C57.2 C58.2 C59.1 C60.1 R2.2 R5.1 R6.1 U1.6 U1.11 U1.20 U1.21 U1.27 U1.50 U1.75 U1.100 U3.B3 U4-1.5 U4-1.8 U4-2.5 U4-2.8 U4-3.5 U4-3.8 U4-4.5 U4-4.8 U5-1.24 U5-2.24 U11.2 | length 3223
  Top Layer w6: C9.2@3255,3133.22 3262.63,3125.59 3262.63,3117.37 3315.63,3064.37 U1.11@3349.88,3064.37 ; C6.1@3256.14,2790 3256.45,2790.3 C6.1@3260.97,2794.82 ; C60.1@3256.45,2888.63 C60.1@3262.87,2882.2 ; C6.1@3261.12,2794.97 C6.1@3260.97,2794.82 ; C60.1@3262.87,2887.2 U1.20@3349.88,2887.2 ; v1(3300,3165) 3301.1,3163.9 3348.78,3163.9 U1.6@3349.88,3162.8 ; U1.21@3349.88,2867.52 3348.45,2866.09 3321.09,2866.09 3300,2845 3300,2817.64 3277.18,2794.82 C6.1@3260.97,2794.82 ; C13.2@3353.22,3415 3353.22,3395.67 3393.9,3355 3412.26,3355 3415.78,3351.49 3415.78,3333.12 U1.100@3418.78,3330.12 ; U1.27@3438.46,2719.88 3438.46,2674.16 3446.78,2665.85 C10.2@3446.78,2630 ; C27.2@3478.22,2295 3478.39,2295.16 U4-3.5@3478.39,2345.69 ; C21.2@3478.22,3475 3478.39,3475.16 U4-1.5@3478.39,3526.79 ; U4-3.8@3547.76,2356.02 3592.09,2356.02 3600,2363.93 C28.1@3600,2368.86 ; U4-1.8@3547.76,3537.12 3550.27,3539.64 3566.15,3539.64 3580.37,3553.86 C22.1@3600,3553.86 ; C29.1@3650,2368.86 C29.1@3651.14,2370 ; U3.B3@3865,3680.75 C18.2@3918.62,3680.75 ; U1.50@3891.22,2719.88 3891.22,2673.78 3918.88,2646.12 3918.88,2637.63 3924.46,2632.06 C11.2@3925,2632.06 ; U1.75@3960.12,3261.22 3991.22,3261.22 4020,3290 C12.2@4052,3290 ; C12.2@4052,3292.78 C12.2@4055,3295.78 ; U5-2.24@4483.9,2394.14 U5-2.24@4484.33,2394.57 ; C24.2@4853.23,3475 4856.34,3478.11 U4-2.5@4856.34,3526.79 ; U4-4.5@4856.34,2345.69 4856.34,2296.89 C30.2@4858.23,2295 ; U4-4.8@4925.71,2356.02 4967.37,2356.02 4975,2363.65 C31.1@4975,2363.86 ; U4-2.8@4925.71,3537.12 4928.22,3539.64 4949.64,3539.64 4958.88,3548.88 4970.03,3548.88 C25.1@4975,3553.86
  Top Layer w10: v2(4001.5,2390) 4004.81,2393.31 4104.17,2393.31 U5-1.24@4105,2394.14 ; U5-2.24@4484.33,2394.57 4484.95,2393.95 4563.57,2393.95 v2(4563.76,2393.76)
  Top Layer w15: v2(3050,2850) 3052.01,2847.99 3052.01,2825.44 3074.32,2803.13 3074.83,2803.13 R2.2@3077.96,2800 ; U11.2@3168.48,3427.08 3224.02,3427.08 3289.19,3492.25 C57.2@3289.19,3496.2 ; v2(3196.82,3161.82) 3225.41,3133.22 C9.2@3255,3133.22 ; C6.1@3256.14,2790 C8.1@3256.14,2740 3280,2740 v2(3300,2720) ; C6.1@3256.45,2790.3 C59.1@3256.45,2838.63 C60.1@3256.45,2888.63 ; C57.2@3292.32,3500.31 C58.2@3342.32,3500.31 3342.47,3500.15 3379.85,3500.15 v2(3380,3500) 3376.17,3496.17 3376.17,3486.17 3355,3465 C13.2@3355,3416.78 ; v2(3440,3476.5) 3440.75,3475.75 3477.47,3475.75 C21.2@3478.22,3475 ; v2(3445,2585) 3445.89,2585.89 3445.89,2629.11 C10.2@3446.78,2630 ; v2(3478.22,2265.5) C27.2@3478.22,2295 ; C28.1@3600,2368.86 C29.1@3650,2368.86 ; C22.1@3600,3553.86 C23.1@3650,3553.86 3650,3551.25 3653.13,3548.12 3684.75,3548.12 v2(3688.57,3544.29) ; C29.1@3651.14,2370 3651.72,2369.43 3699.43,2369.43 v2(3700,2370) ; v2(3750,3755) 3755.41,3755 3772.45,3772.04 R6.1@3829.25,3772.04 R5.1@3869.25,3772.04 ; C7.1@3916.14,2580 v2(3965,2580) ; C7.1@3916.78,2580.63 C11.2@3916.78,2630 ; C18.2@3924.25,3686.78 3924.25,3685.39 3927.38,3682.26 3947.74,3682.26 3965,3665 v2(3965,3605) ; v2(4052,3355) 4052,3298.78 C12.2@4055,3295.78 ; v2(4760,3500) 4765.41,3500 4790.41,3475 C24.2@4853.23,3475 ; v2(4820,2295) C30.2@4858.23,2295 ; C31.1@4975,2363.86 C32.1@5025,2363.86 v2(5025,2320) ; C25.1@4975,3553.86 C26.1@5025,3553.86 v2(5025,3505)
VDD2: C38.1 C39.1 C40.1 C41.1 C42.2 C43.2 C44.2 C45.2 C48.2 C49.2 C50.2 C51.2 C52.2 C53.2 C54.2 C61.2 C62.1 R10.2 R14.2 R17.2 R20.2 R23.2 U6.6 U6.11 U6.20 U6.21 U6.27 U6.50 U6.75 U6.100 U7.2 U8-1.8 U8-2.8 U8-3.8 U8-4.8 U9.1 | length 2640.5
  Top Layer w6: C53.2@3403.22,3795 C53.2@3405,3796.78 3459.11,3796.78 3461.62,3799.29 U8-4.8@3461.62,3805.61 ; R23.2@3407.45,3870 R23.2@3407.96,3870 ; C52.2@4086.78,3800 C52.2@4090,3796.78 ; C52.2@4092.36,3800.34 4097.63,3805.61 U8-3.8@4146.62,3805.61 ; C45.2@4310,2773.22 4358.23,2773.22 4373.78,2788.78 U6.75@4404.88,2788.78 ; C44.2@4463.23,3420 4463.23,3386.78 4473.78,3376.22 U6.50@4473.78,3330.12 ; C54.2@4745,2058.22 C54.2@4741.77,2055 4785.61,2055 4795.99,2044.62 U9.1@4805.83,2044.62 ; C51.2@4776.77,3800 C51.2@4780,3796.78 4784.92,3801.7 4834.11,3801.7 4836.62,3804.21 U8-2.8@4836.62,3805.61 ; R17.2@4782.45,3870 R17.2@4782.96,3870 ; C43.2@4913.23,3420 4913.23,3386.65 4926.54,3373.34 U6.27@4926.54,3330.12 ; U6.100@4946.22,2719.88 4946.22,2673.78 4956.77,2663.22 C61.2@4956.77,2630 ; v2(4965,2885) 4966.1,2886.1 5014.02,2886.1 U6.6@5015.12,2887.2 ; U6.11@5015.12,2985.63 5051.31,2985.63 5114.13,2922.81 5114.13,2902.65 C42.2@5115,2901.78 C42.2@5116.77,2900 ; U6.20@5015.12,3162.8 5077.8,3162.8 5085,3170 C40.1@5118.85,3170 ; U6.21@5015.12,3182.48 5062.48,3182.48 5097.82,3217.82 5116.67,3217.82 C38.1@5118.85,3220 ; C50.2@5205,2813.22 C50.2@5201.77,2810 5205.61,2806.16 U8-1.8@5205.61,2753.38
  Top Layer w15: C53.2@3403.22,3795 v2(3350,3795) 3353.83,3798.83 3353.83,3816.37 R23.2@3407.45,3870 ; C52.2@4086.78,3800 v2(4035,3800) 4089.32,3854.32 4089.32,3866.87 4092.45,3870 R20.2@4092.96,3870 ; v2(4310,2730) C45.2@4310,2773.22 ; v2(4420,3420) 4445,3445 4463.23,3445 ; C44.2@4463.23,3420 4463.23,3445 ; C62.1@4463.23,3470 4463.23,3445 ; v1(4463.36,2503.36) 4464.7,2504.7 4464.7,2517.24 4482.45,2535 R10.2@4482.96,2535 ; C54.2@4745,2058.22 v2(4745,2095) ; C51.2@4776.77,3800 v2(4725,3800) 4728.83,3803.83 4728.83,3816.37 R17.2@4782.45,3870 ; v2(4865,3420) C43.2@4913.23,3420 ; C61.2@4956.77,2630 v2(5005,2630) ; C42.2@5116.77,2900 v2(5150,2900) ; C41.1@5118.85,3120 C40.1@5118.85,3170 C38.1@5118.85,3220 C39.1@5118.85,3270 5118.85,3318.86 v2(5140,3340) 5165,3315 5200.03,3315 5209.03,3306 5209.03,3301.08 5212.16,3297.95 C49.2@5217.08,3297.95 C48.2@5217.08,3350 5217.08,3382.92 5170,3430 U7.2@5170,3478 ; C50.2@5205,2813.13 5203.54,2813.13 5203.54,2848.54 v2(5240,2885) 5240,2881.16 5266.36,2854.8 5266.36,2813.22 5270,2809.59 R14.2@5270,2809.08
pads on no net: LED1.1 P1.5 P1.6 P2-1.25 P2-1.26 P2-2.31 P2-2.32 P3.5 P3.6 P4-1.5 P4-1.6 P4-2.5 P4-2.6 P4-3.5 P4-3.6 P4-4.5 P4-4.6 P4-6.5 P4-6.6 P4-7.5 P4-7.6 P6.9 P6.10 P6.11 P6.12 U1.2 U1.22 U1.23 U1.24 U1.29 U1.34 U1.40 U1.41 U1.42 U1.43 U1.44 U1.45 U1.46 U1.47 U4-1.2 U4-1.3 U4-2.2 U4-2.3 U4-3.2 U4-3.3 U4-4.2 U4-4.3 U5-2.16 U5-2.17 U6.3 U6.4 U6.5 U6.7 U6.8 U6.9 U6.15 U6.16 U6.17 U6.18 U6.22 U6.23 U6.24 U6.25 U6.32 U6.33 U6.34 U6.35 U6.36 U6.37 U6.38 U6.40 U6.41 U6.42 U6.43 U6.44 U6.45 U6.46 U6.47 U6.51 U6.52 U6.53 U6.54 U6.55 U6.56 U6.57 U6.58 U6.59 U6.60 U6.61 U6.66 U6.67 U6.68 U6.69 U6.70 U6.71 U6.81 U6.82 U6.84 U6.85 U6.88 U6.91 U8-1.9 U8-2.9 U8-3.9 U8-4.9 U9.10 U9.11 U9.12 U9.13 U9.14 U9.15 U9.16 U9.17 U10. U10.A8 U10.B8
copper on no net: | length 5.9
  Top Layer w6: 5012.54,3199.58 5015.12,3202.17 ; 5013.54,3223.43 5015.12,3221.85

## Polygon pours and split planes (outlines as drawn)
GND on GND (split plane): 2859.09,4137.11 5515,4137.11 5515.5,4137.16 5519.69,4136.83 5524.27,4135.73 5528.62,4133.93 5532.63,4131.47 5536.21,4128.41 5539.26,4124.83 5541.72,4120.82 5543.52,4116.47 5544.62,4111.9 5544.95,4107.71 5544.9,4107.2 5544.9,1845 5544.95,1844.5 5544.62,1840.31 5543.52,1835.73 5541.72,1831.38 5539.26,1827.37 5536.21,1823.79 5532.63,1820.74 5528.62,1818.28 5524.27,1816.48 5519.69,1815.38 5515.5,1815.05 5515,1815.1 2859.09,1815.1 2858.59,1815.05 2854.4,1815.38 2849.83,1816.48 2845.48,1818.28 2841.47,1820.74 2837.89,1823.79 2834.83,1827.37 2832.37,1831.38 2830.57,1835.73 2829.47,1840.31 2829.14,1844.5 2829.19,1845 2829.19,4107.2 2829.14,4107.71 2829.47,4111.9 2830.57,4116.47 2832.37,4120.82 2834.83,4124.83 2837.89,4128.41 2841.47,4131.47 2845.48,4133.93 2849.83,4135.73 2854.4,4136.83 2858.59,4137.16
+5V on POWER (split plane): 2859.09,4137.11 5515,4137.11 5515.5,4137.16 5519.69,4136.83 5524.27,4135.73 5528.62,4133.93 5532.63,4131.47 5536.21,4128.41 5539.26,4124.83 5541.72,4120.82 5543.52,4116.47 5544.62,4111.9 5544.95,4107.71 5544.9,4107.2 5544.9,1845 5544.95,1844.5 5544.62,1840.31 5543.52,1835.73 5541.72,1831.38 5539.26,1827.37 5536.21,1823.79 5532.63,1820.74 5528.62,1818.28 5524.27,1816.48 5519.69,1815.38 5515.5,1815.05 5515,1815.1 2859.09,1815.1 2858.59,1815.05 2854.4,1815.38 2849.83,1816.48 2845.48,1818.28 2841.47,1820.74 2837.89,1823.79 2834.83,1827.37 2832.37,1831.38 2830.57,1835.73 2829.47,1840.31 2829.14,1844.5 2829.19,1845 2829.19,4107.2 2829.14,4107.71 2829.47,4111.9 2830.57,4116.47 2832.37,4120.82 2834.83,4124.83 2837.89,4128.41 2841.47,4131.47 2845.48,4133.93 2849.83,4135.73 2854.4,4136.83 2858.59,4137.16
VDD2 on POWER (split plane): 5284.91,3585.82 5284.91,2649.18 5272.87,2637.13 5235.82,2600.09 5165,2600.09 5162.39,2599.74 5161.17,2599.24 5159.96,2598.74 5157.87,2597.13 5107.87,2547.13 5106.27,2545.04 5105.26,2542.61 5104.91,2540 5104.91,2154.18 4980.82,2030.09 4625.1,2030.09 4625.1,2097.89 4682.11,2154.9 4965,2154.9 4966.95,2155.29 4968.6,2156.4 5063.6,2251.4 5064.71,2253.05 5065.1,2255 5065.1,2490 5064.71,2491.95 5063.6,2493.6 5048.6,2508.6 5046.95,2509.71 5045,2510.1 4985,2510.1 4983.05,2509.71 4981.4,2508.6 4952.89,2480.1 4447.11,2480.1 4285.1,2642.11 4285.1,3382.89 4353.6,3451.4 4437.11,3534.9 4627.89,3534.9 4711.4,3451.4 4713.05,3450.29 4715,3449.9 5020,3449.9 5021.95,3450.29 5023.6,3451.4 5068.6,3496.4 5069.71,3498.05 5070.1,3500 5070.1,3565 5069.71,3566.95 5068.6,3568.6 4948.6,3688.6 4946.95,3689.71 4945,3690.1 4042.11,3690.1 3938.6,3793.6 3936.95,3794.71 3935,3795.1 3540,3795.1 3538.05,3794.71 3536.4,3793.6 3487.89,3745.1 3327.11,3745.1 3300.1,3772.11 3300.1,3785 3300.1,3795.83 3379.18,3874.91 4995.82,3874.91
VDD1 on POWER (split plane): 3289.9,3785 3289.9,3770 3290.29,3768.05 3291.4,3766.4 3321.4,3736.4 3323.05,3735.29 3325,3734.9 3490,3734.9 3491.95,3735.29 3493.6,3736.4 3542.11,3784.9 3932.89,3784.9 4036.4,3681.4 4038.05,3680.29 4040,3679.9 4942.89,3679.9 5059.9,3562.89 5059.9,3502.11 5017.89,3460.1 4717.11,3460.1 4633.6,3543.6 4631.95,3544.71 4630,3545.1 4435,3545.1 4433.05,3544.71 4431.4,3543.6 4346.4,3458.61 4346.4,3458.6 4276.4,3388.6 4275.29,3386.95 4274.9,3385 4274.9,2640 4275.29,2638.05 4276.4,2636.4 4441.4,2471.4 4443.05,2470.29 4445,2469.9 4955,2469.9 4956.95,2470.29 4958.6,2471.4 4987.11,2499.9 5042.89,2499.9 5054.9,2487.89 5054.9,2257.11 4962.89,2165.1 4680,2165.1 4678.05,2164.71 4676.4,2163.6 4616.4,2103.6 4615.29,2101.95 4614.9,2100 4614.9,2030.09 3214.18,2030.09 3015.09,2229.18 3015.09,3510.82 3289.9,3785.64

## Keep-outs
Keep-Out Layer:
  the board outline again, w10

## Other copper
GND (plane layer: these items are gaps in the copper):
  lines w10: 5255,2580 5295,2620 5295,3220
POWER (plane layer: these items are gaps in the copper):
  lines w10: 3295,3810 3295,3785 3295,3770 3325,3740 3490,3740 3540,3790 3770,3790 3935,3790 4040,3685 4945,3685 5065,3565 5065,3500 5020,3455 4715,3455 4630,3540 4435,3540 4350,3455 4280,3385 4280,2640 4445,2475 4955,2475 4985,2505 5045,2505 5060,2490 5060,2255 4965,2160 4680,2160 4620,2100 4620,1990
  lines w20: 3005,2225 3005,3515 3375,3885 5000,3885 5295,3590 5295,2645 5280,2630 5240,2590 5165,2590 5115,2540 5115,2150 4985,2020 3210,2020 3005,2225

## Silkscreen, mask and mechanical layers (free items; w line width, h text height)
Top Overlay:
  text "Finger4" at 3340,3930 h30 r90
  text "Finger3" at 4025,3930 h30 r90
  text "Finger2" at 4710,3930 h30 r90
  text "Finger1" at 5335,2865 h30
  text "U1 RESET" at 3154,2544 h20
  text "U6 RESET" at 4599,2484 h20
  text "T" at 2840,2160 h30
  text "D" at 2845,1835 h30
  text "+" at 5050,1825 h60
  text "-" at 5455,1825.01 h60

## Text inside footprints (layer, text, board x,y; h text height)
P5: Top Overlay "Line" at 5277.48,1882.15 h31.5 r90